# EAGLE board KVMeter (EAGLE 9.6.2)
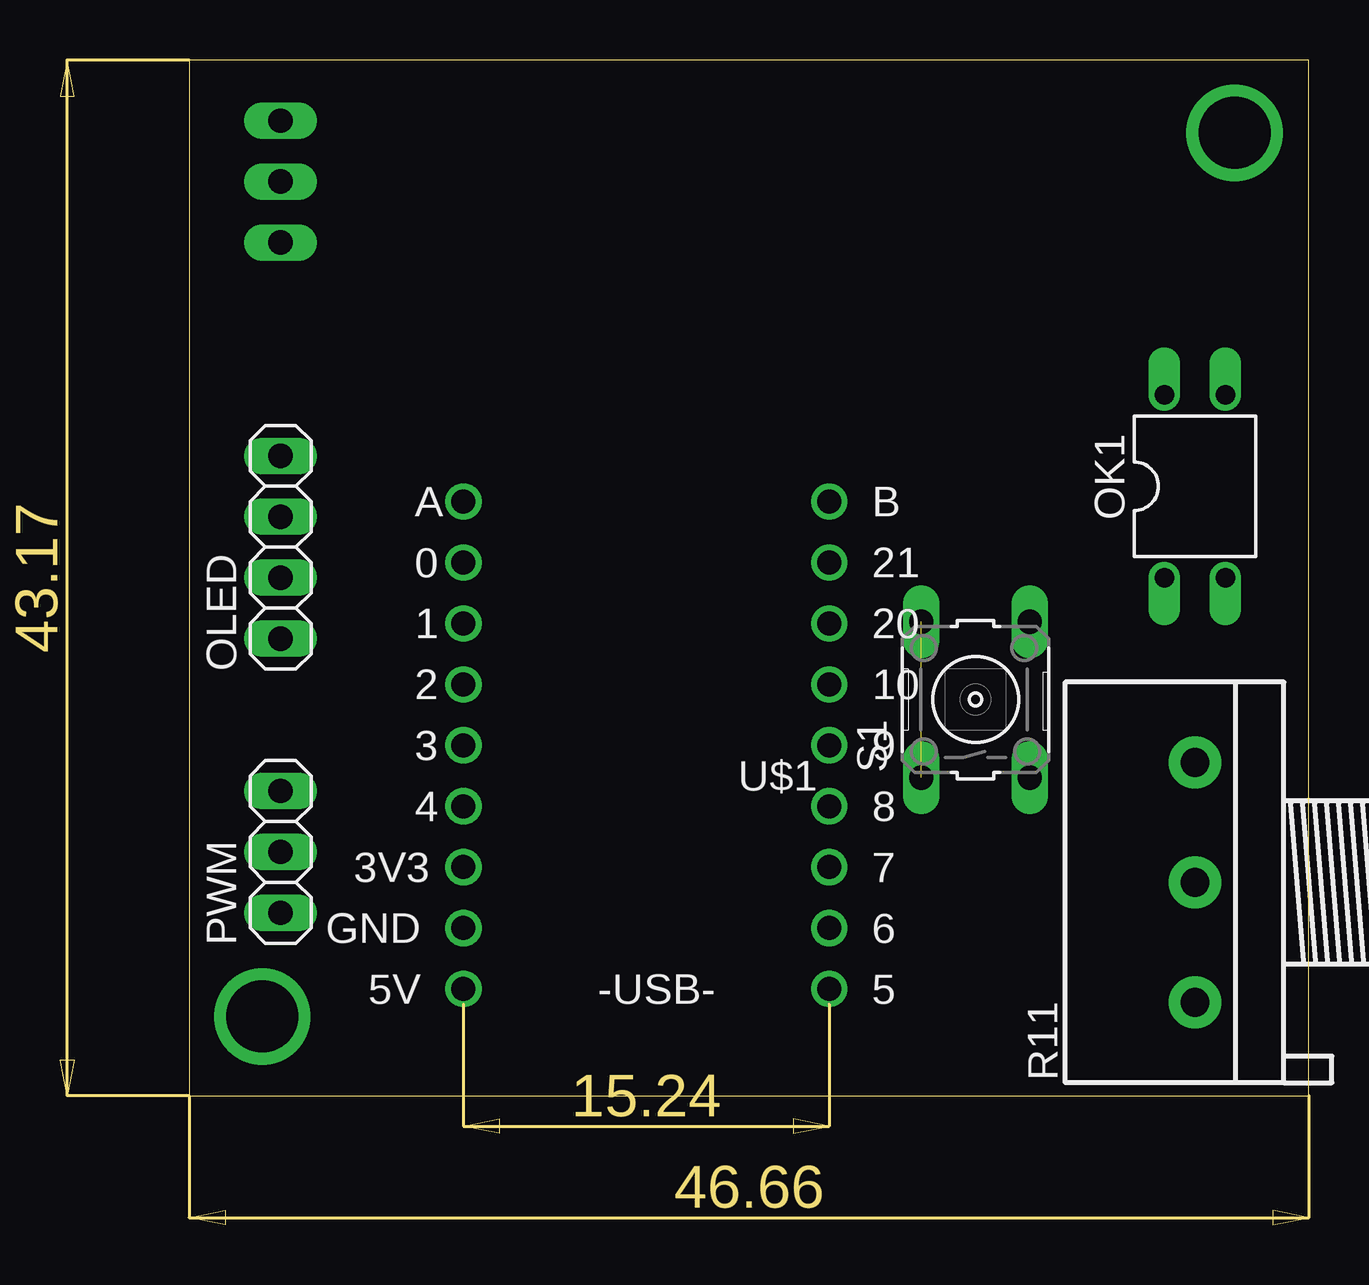
[diagram p0: board, top side]
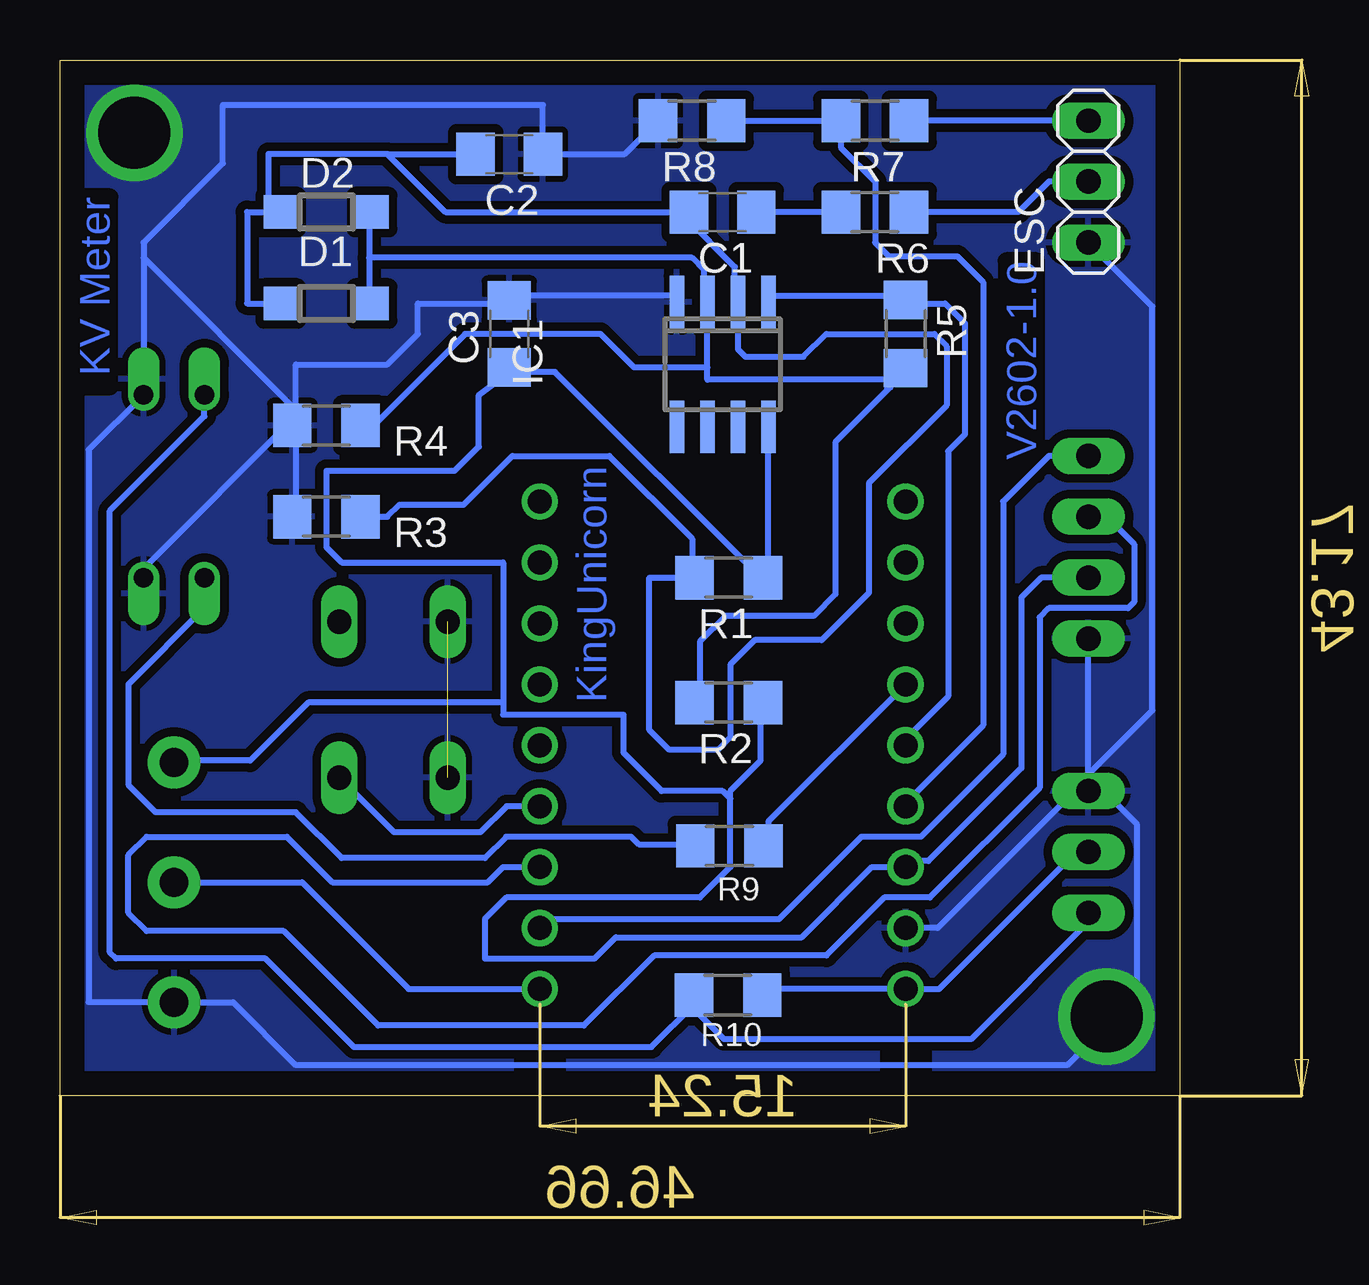
[diagram p1: board, bottom side, seen from below]

Size 46.66 x 43.17 mm. Coordinates in mm from the lower left corner, seen from the top.
Outline: 0,0 46.66,0 46.66,43.17 0,43.17 0,0
Copper layers (1*16): Top 0.035mm / dielectric 1.5mm / Bottom 0.035mm
Design rules "default *": minimum track width 10mil, minimum drill 0.6mm, track to track 10mil, track to pad 10mil, pad to pad 10mil, via to via 10mil, smd to smd 10mil, copper to edge 40mil, drill to drill 10mil, minimum pad ring 10mil, minimum via ring 8mil, stop-mask expansion 4mil, vias tented up to drill 0mil, thermal gap 10mil

## Footprints (pad centres in the part's own frame; a part is rotated, then mirrored left to right if it is on the bottom)
C1206 = smd 1.6 x 1.8: 1 -1.4,0; 2 1.4,0
SOD123 = smd 1.4 x 1.4: A 1.9,0; C -1.9,0
1X03 = drill 1.016 long: 1 -2.54,0; 2 0,0; 3 2.54,0
SO08 = smd 0.6 x 2.2: 1 -1.905,-2.6; 2 -0.635,-2.6; 3 0.635,-2.6; 4 1.905,-2.6; 5 1.905,2.6; 6 0.635,2.6; 7 -0.635,2.6; 8 -1.905,2.6
DIL04 = drill 0.813 offset: 1 -1.27,-3.81; 2 1.27,-3.81; 3 1.27,3.81; 4 -1.27,3.81
1X04 = drill 1.016 long: 1 -3.81,0; 2 -1.27,0; 3 1.27,0; 4 3.81,0
R1206 = smd 1.6 x 1.803: 1 -1.422,0; 2 1.422,0
3RP/1610N = drill 1.2 pad 2.184: 1 -5,0; 2 0,0; 3 5,0
B3F-10XX = drill 1.016 long: 1 -3.251,2.261; 2 3.251,2.261; 3 -3.251,-2.261; 4 3.251,-2.261
ESP32SUPERMINI_ESP32-SUPERMINI = drill 1: 0 -11.43,9.525; 1 -11.43,6.985; 2 -11.43,4.445; 3 -11.43,1.905; 3V3 -11.43,-3.175; 4 -11.43,-0.635; 5 3.81,-8.255; 5V -11.43,-8.255; 6 3.81,-5.715; 7 3.81,-3.175; 8 3.81,-0.635; 9 3.81,1.905; 10 3.81,4.445; 20 3.81,6.985; 21 3.81,9.525; A -11.43,12.065; B 3.81,12.065; GND -11.43,-5.715

## Placement (x,y rotation side)
C1  100n  [C1206]  19.05,36.83 180 bottom
C2  10n  [C1206]  27.94,39.24 180 bottom
C3  4.7uf  [C1206]  27.94,31.75 90 bottom
D1  [SOD123]  35.56,33.02 180 bottom
D2  [SOD123]  35.56,36.83 0 bottom
ESC  [1X03]  3.81,38.1 90 bottom
IC1  LM358D  [SO08]  19.05,30.48 180 bottom
OK1  PC817  [DIL04]  41.91,25.4 0 top
OLED  [1X04]  3.81,22.86 90 top
PWM  [1X03]  3.81,10.16 90 top
R1  47K  [R1206]  18.8,21.59 0 bottom
R2  47K  [R1206]  18.8,16.38 0 bottom
R3  47K  [R1206]  35.56,24.13 0 bottom
R4  47K  [R1206]  35.56,27.94 0 bottom
R5  470K  [R1206]  11.43,31.75 270 bottom
R6  100K  [R1206]  12.7,36.83 0 bottom
R7  47K  [R1206]  12.7,40.64 180 bottom
R8  10K  [R1206]  20.32,40.64 0 bottom
R9  220  [R1206]  18.77,10.41 180 bottom
R10  10K  [R1206]  18.82,4.19 0 bottom
R11  [3RP/1610N]  41.91,8.89 90 top
S1  [B3F-10XX]  32.77,16.51 90 top
U$1  ESP32SUPERMINI_ESP32-SUPERMINI  [ESP32SUPERMINI_ESP32-SUPERMINI]  22.86,12.7 0 top

## Library data of the parts
C1-C3 = rcl; SPICEPREFIX: C
D1 D2 = diode
ESC OLED PWM = pinhead
IC1 = linear
OK1 = optocoupler; MPN: PC817X4J000F; OC_FARNELL: 9707727; OC_NEWARK: 97K7059
R1-R10 = rcl; SPICEPREFIX: R
R11 = pot
S1 = switch-omron; MPN: B3F-1000; OC_FARNELL: 176432; OC_NEWARK: 36M3542
U$1 = ESP32C3supermini

## Nets
+3V3: C3.1 IC1.8 OLED.2 R1.2 R2.2 R11.3 U$1.3V3
+5V: PWM.2 R10.2 U$1.5V
BTN1: S1.3 U$1.8
GND: C2.1 C3.2 ESC.1 IC1.4 OK1.2 OK1.3 OLED.1 PWM.3 R3.1 R4.1 R8.1 R11.1 S1.1 S1.2 U$1.GND
N$1: D1.C D2.A IC1.3 R2.1 R4.2 R5.2
N$3: C1.1 R6.1
N$5: OLED.4 U$1.6
N$7: C1.2 C2.2 D1.A D2.C IC1.2 R1.1 R3.2
N$10: OLED.3 U$1.7
N$12: OK1.1 R9.2
POT: R11.2 U$1.5
PWM3.3V: R9.1 U$1.2
PWM-SIG: OK1.4 PWM.1 R10.1
RPM-IN: ESC.2 R6.2
RPM-OUT: IC1.1 R5.1 U$1.3
VOLTAGE-MEAS-IN: ESC.3 R7.1
VOLTAGE-MEAS-OUT: R7.2 R8.2 U$1.4

## Tracks (layer width: path | path; a pad name or v marks a point on that pad's centre or on a via)
+3V3
  Bottom 0.254: OLED.2 5.78,21.59 6.6,20.77 6.6,13.65 10.48,9.78 11.18,9.78 U$1.3V3 12.83,9.53 15.75,6.6 23.5,6.6 24.38,5.71 28.96,5.71 28.96,7.37 28.06,8.26 19.99,8.26 18.73,9.53 18.73,12.38 | 27.94,30.16 26.04,30.16 17.46,21.59 R1.2 17.14,21.59 IC1.8 | 18.73,12.38 18.73,12.7 17.46,13.97 17.46,16.19 R2.2 | 41.91,13.65 R11.3 41.91,13.97 38.73,13.97 36.32,16.38 28.19,16.38 | 27.94,30.16 29.21,29.21 29.21,27.05 30.23,26.04 35.56,26.04 35.56,22.86 34.92,22.23 28.19,22.23 28.19,16.38 | 18.73,12.38 19.05,12.7 21.59,12.7 23.18,14.29 23.18,15.88 28.19,15.88 28.19,16.38 | 27.94,30.16 C3.1
+5V
  Bottom 0.254: R10.2 17.14,4.45 U$1.5V 10.03,4.45 4.32,10.16 PWM.2
BTN1
  Bottom 0.254: U$1.8 28.05,12.06 29.14,10.97 32.74,10.97 S1.3
GND  (via drill 3)  (1 unrouted)
  Bottom 0.254: U$1.GND 10.1,6.99 4.38,12.7 PWM.3 | PWM.3 3.81,13.4 | 3.81,13.4 OLED.1 | ESC.1 1.14,32.89 1.14,16.07 3.81,13.4 | IC1.4 20.95,33.34 27.94,33.34 C3.2 27.94,33.02 31.75,33.02 31.75,31.75 33.02,30.48 36.83,30.48 36.83,28.32 | 36.83,27.94 36.83,24.13 R3.1 | 36.83,28.09 36.83,28.32 | 21.59,40.64 R8.1 23.14,39.24 C2.1 26.54,41.29 39.88,41.29 39.88,38.86 43.18,35.56 43.18,34.92 | PWM.3 3.17,12.7 1.78,11.3 1.78,4.19 4.7,1.27 36.83,1.27 39.45,3.89 R11.1 45.47,3.89 45.47,26.92 OK1.3 43.18,34.92 | OK1.2 43.18,21.97 36.83,28.32 | 36.83,27.94 R4.1 | 36.83,27.94 36.83,28.57 43.18,34.92
  other vias: 43.56,40.13 3.05,3.3
  pour Bottom (isolate 0.356): 0,0 0,43.18 46.99,43.18 46.99,0
N$1
  Bottom 0.254: D1.C 33.78,33.02 33.78,34.92 | 12.06,29.53 12.16,29.43 | 12.16,29.43 14.35,27.24 14.35,20.89 15.24,20 18.92,20 20,18.92 20,16.51 R2.1 | R4.2 33.59,27.94 29.78,31.75 24.13,31.75 22.73,30.35 19.68,30.35 | 19.68,30.35 19.68,29.84 11.75,29.84 11.43,30.16 R5.2 11.68,29.97 12.19,29.46 12.16,29.43 | 19.68,30.35 IC1.3 19.81,33.27 19.81,34.42 20.32,34.92 33.78,34.92 | 33.78,34.92 33.78,36.83 D2.A
N$3
  Bottom 0.254: R6.1 C1.1
N$5
  Bottom 0.254: U$1.6 26.29,7.37 16.7,7.37 13.27,10.79 10.79,10.79 7.37,14.22 7.37,24.77 5.46,26.67 OLED.4
N$7
  Bottom 0.254: 20.32,21.59 22.1,21.59 22.1,15.24 21.27,14.41 19.24,14.41 18.73,14.92 18.73,17.97 17.72,18.99 14.92,18.99 12.95,20.95 12.95,25.53 9.72,28.77 9.72,31.24 10.22,31.75 14.73,31.75 15.68,30.8 18.1,30.8 18.41,31.11 IC1.2 18.54,33.27 18.54,34.54 20.64,36.64 20.32,36.96 C1.2 30.61,36.83 33.02,39.24 | 20.32,21.59 R1.1 | D1.A 38.86,33.02 38.86,36.83 D2.C 37.97,36.83 37.97,39.24 33.02,39.24 | 33.02,39.24 C2.2 | R3.2 33.02,24.13 32.51,24.64 29.84,24.64 27.81,26.67 23.77,26.67 20.32,23.22 20.32,21.59
N$10
  Bottom 0.254: OLED.3 3.05,24.13 1.91,22.99 1.91,20.57 2.16,20.32 5.46,20.32 5.84,19.94 5.84,12.83 10.41,8.26 12.32,8.26 14.73,5.84 21.91,5.84 24.83,2.92 33.4,2.92 37.34,6.86 43.05,6.86 43.81,7.62 43.81,10.03 43.05,10.79 37.21,10.79 35.31,8.89 28.83,8.89 28.19,9.53 U$1.7
N$12
  Bottom 0.254: R9.2 20.32,10.48 22.54,10.48 22.86,10.79 28.07,10.79 28.96,9.91 34.92,9.91 36.83,11.81 42.67,11.81 43.81,12.95 43.81,17.14 40.64,20.32 OK1.1
POT
  Bottom 0.254: U$1.5 32.13,4.45 36.58,8.89 R11.2
PWM3.3V
  Bottom 0.254: U$1.2 17.14,11.43 17.14,10.48 R9.1
PWM-SIG
  Bottom 0.254: 20.24,3.81 R10.1 20.32,4.13 | PWM.1 3.81,7.24 8.7,2.35 18.99,2.35 20.24,3.61 20.24,3.81 | OK1.4 40.64,28.32 44.58,24.38 44.58,5.97 44.32,5.71 38.1,5.71 34.42,2.03 22.02,2.03 20.24,3.81
RPM-IN
  Bottom 0.254: R6.2 6.73,36.83 5.46,38.1 ESC.2
RPM-OUT
  Bottom 0.254: IC1.1 17.14,33.34 11.43,33.34 R5.1 11.43,33.02 9.78,33.02 8.95,32.19 8.95,27.56 9.65,26.86 9.65,16.64 11.43,14.86 U$1.3
VOLTAGE-MEAS-IN
  Bottom 0.254: ESC.3 R7.1
VOLTAGE-MEAS-OUT
  Bottom 0.254: U$1.4 11.43,12.19 8.19,15.43 8.19,33.91 9.27,34.99 12.13,34.99 12.7,35.56 12.7,38.1 14.12,39.52 R7.2 R8.2

## Text on the board
Bottom: KV Meter | V2602-1.0 | KingUnicorn